# EAGLE board Fall2018AvionicsBay (EAGLE 8.5.2)

Size 346.69 x 100 mm. Coordinates in mm from the lower left corner, seen from the top.
Outline: 0,0 346.69,0 346.69,100 0,100 0,0
Copper layers (1*16): Top 0.035mm / dielectric 1.5mm / Bottom 0.035mm
Design rules "default": minimum track width 6mil, minimum drill 0.35mm, track to track 6mil, track to pad 6mil, pad to pad 6mil, via to via 6mil, smd to smd 6mil, copper to edge 40mil, drill to drill 6mil, minimum pad ring 10mil, minimum via ring 8mil, stop-mask expansion 4mil, vias tented up to drill 0mil, thermal gap 10mil
Net classes: 1 vcc: width 0.305 mm

## Footprints (pad centres in the part's own frame; a part is rotated, then mirrored left to right if it is on the bottom)
3,2-PAD = drill 3.2 pad 5.842: B3,2 0,0
3,2 = hole 3.2: 0,0
1X04_NO_SILK_ALL_ROUND = drill 1.016 pad 1.88: 1 0,0; 2 2.54,0; 3 5.08,0; 4 7.62,0
1X04_NO_SILK = drill 1.016 pad 1.88 square: 1 0,0 | drill 1.016 pad 1.88: 2 2.54,0; 3 5.08,0; 4 7.62,0
1X06_NO_SILK = drill 1.016 pad 1.88: 1 0,0; 2 2.54,0; 3 5.08,0; 4 7.62,0; 5 10.16,0; 6 12.7,0
1X04 = drill 1.016 pad 1.88 square: 1 0,0 | drill 1.016 pad 1.88: 2 2.54,0; 3 5.08,0; 4 7.62,0
TEENSY_3.5/3.6_BASIC = drill 0.965: 0/RX -25.4,-7.62; 1/TX -22.86,-7.62; 2 -20.32,-7.62; 3/CANTX -17.78,-7.62; 3V3 7.62,-7.62; 3V3_LO -22.86,7.62; 4/CANRX -15.24,-7.62; 5 -12.7,-7.62; 6 -10.16,-7.62; 7 -7.62,-7.62; 8 -5.08,-7.62; 9/CS -2.54,-7.62; 10/CS 0,-7.62; 11/MOSI 2.54,-7.62; 12/MISO 5.08,-7.62; 13/SCK 5.08,7.62; 14/A0 2.54,7.62; 15/A1 0,7.62; 16/A2 -2.54,7.62; 17/A3 -5.08,7.62; 18/A4/SDA -7.62,7.62; 19/A5/SCL -10.16,7.62; 20/A6 -12.7,7.62; 21/A7 -15.24,7.62; 21/DAC0 12.7,7.62; 22/A8 -17.78,7.62; 23/A9 -20.32,7.62; 24 10.16,-7.62; 25 12.7,-7.62; 26 15.24,-7.62; 27 17.78,-7.62; 28 20.32,-7.62; 29 22.86,-7.62; 30 25.4,-7.62; 31/A12 27.94,-7.62; 32/A13 30.48,-7.62; 33/A14 30.48,7.62; 34/A15 27.94,7.62; 35/A16 25.4,7.62; 36/A17 22.86,7.62; 37/A18 20.32,7.62; 38/A19 17.78,7.62; 39/A20 15.24,7.62; A10 -17.78,5.08; A11 -15.24,5.08; A22/DAC1 10.16,7.62; AGND -25.4,7.62; AREF -20.32,5.08; GND -27.94,-7.62; GND2 7.62,7.62; VIN -27.94,7.62; VUSB -25.4,5.08
XBEE = drill 0.8 pad 1.27: 1 -11,9; 2 -11,7; 3 -11,5; 4 -11,3; 5 -11,1; 6 -11,-1; 7 -11,-3; 8 -11,-5; 9 -11,-7; 10 -11,-9; 11 11,-9; 12 11,-7; 13 11,-5; 14 11,-3; 15 11,-1; 16 11,1; 17 11,3; 18 11,5; 19 11,7; 20 11,9

## Placement (x,y rotation side)
H1  MOUNT-PAD-ROUND3.2  [3,2-PAD]  189.23,8.89 0 top
H2  MOUNT-PAD-ROUND3.2  [3,2-PAD]  198.12,8.89 0 top
H3  MOUNT-PAD-ROUND3.2  [3,2-PAD]  207.01,8.89 0 top
H4  MOUNT-PAD-ROUND3.2  [3,2-PAD]  233.68,8.89 0 top
H5  MOUNT-PAD-ROUND3.2  [3,2-PAD]  242.57,8.89 0 top
H6  MOUNT-PAD-ROUND3.2  [3,2-PAD]  251.46,8.89 0 top
H7  MOUNT-PAD-ROUND3.2  [3,2-PAD]  260.35,8.89 0 top
H8  MOUNT-PAD-ROUND3.2  [3,2-PAD]  224.79,8.89 0 top
H9  MOUNT-PAD-ROUND3.2  [3,2-PAD]  180.34,8.89 0 top
H10  MOUNT-PAD-ROUND3.2  [3,2-PAD]  215.9,8.89 0 top
H11  MOUNT-PAD-ROUND3.2  [3,2-PAD]  234.95,69.85 0 top
H12  MOUNT-PAD-ROUND3.2  [3,2-PAD]  234.95,60.96 0 top
H13  MOUNT-HOLE3.2  [3,2]  340.36,93.98 0 top
H14  MOUNT-HOLE3.2  [3,2]  340.36,6.35 0 top
H15  MOUNT-HOLE3.2  [3,2]  8.89,92.71 0 top
H16  MOUNT-HOLE3.2  [3,2]  8.89,7.62 0 top
J2  [1X04_NO_SILK_ALL_ROUND]  106.68,24.13 270 top
JP1  [1X04_NO_SILK]  128.27,82.55 270 top
JP2  [1X06_NO_SILK]  138.43,69.85 90 top
JP3  MAIN  [1X04]  62.23,86.36 180 bottom
JP4  SPI  [1X04]  72.39,86.36 180 bottom
JP6  AUX  [1X04]  72.39,71.12 180 bottom
JP7  MISC  [1X04]  62.23,71.12 180 bottom
U$1  TEENSY_3.5/3.6_BASIC  [TEENSY_3.5/3.6_BASIC]  133.35,52.07 0 top
XB1  XBEE  [XBEE]  40.64,48.26 90 top

## Library data of the parts
H1-H16 = holes
J2 = SparkFun-Connectors; PROD_ID: CONN-09696
JP1 = SparkFun-Connectors
JP2 = SparkFun-Connectors; PROD_ID: CONN-08437
JP3 JP4 JP6 JP7 = SparkFun
U$1 = Teensy356
XB1 = maxstream; MPN: XBP24-Z7UIT-004; OC_FARNELL: 1751799; OC_NEWARK: 34R5507

## Nets
3.3V: JP1.2 JP2.5 JP3.2
!CS: JP2.1
CLK: JP4.2
CS: JP4.1
GND: J2.1 JP1.1 JP2.6 JP3.1 JP7.2 U$1.GND XB1.10
MISO: JP4.3
MOSI: JP4.4
N$2: U$1.0/RX
N$3: U$1.1/TX
N$4: U$1.2
N$5: U$1.3/CANTX
N$6: U$1.VIN
NAV: JP7.3
PPS: JP7.4
RX1: JP6.1
RX01: JP3.4
SCK/SCL: JP1.4 JP2.4
SCL: J2.4 JP6.3
SDA: J2.3 JP6.4
SDI/SDA: JP1.3 JP2.2
SDO/ADR: JP2.3
TX0: JP3.3
TX1: JP6.2
VBAT: JP7.1
VCC: XB1.1
VDD: J2.2

## Tracks (layer width: path | path; a pad name or v marks a point on that pad's centre or on a via)
3.3V  (2 unrouted)
GND  (6 unrouted)
SCK/SCL  (1 unrouted)
SCL  (1 unrouted)
SDA  (1 unrouted)
SDI/SDA  (1 unrouted)

## Text on the board
Measures: Units in inches | Units are in Inches
_tsilk: External Bus